# Altium PCB PCB1.PcbDoc
Units mil, origin at the board's own origin, x right, y up, seen from the top; angles counter-clockwise.
Board outline 1900 x 2150 mil, 2 copper layers (Top Layer, Bottom Layer); 9 components, 14 nets, 81 pads, 0 vias.
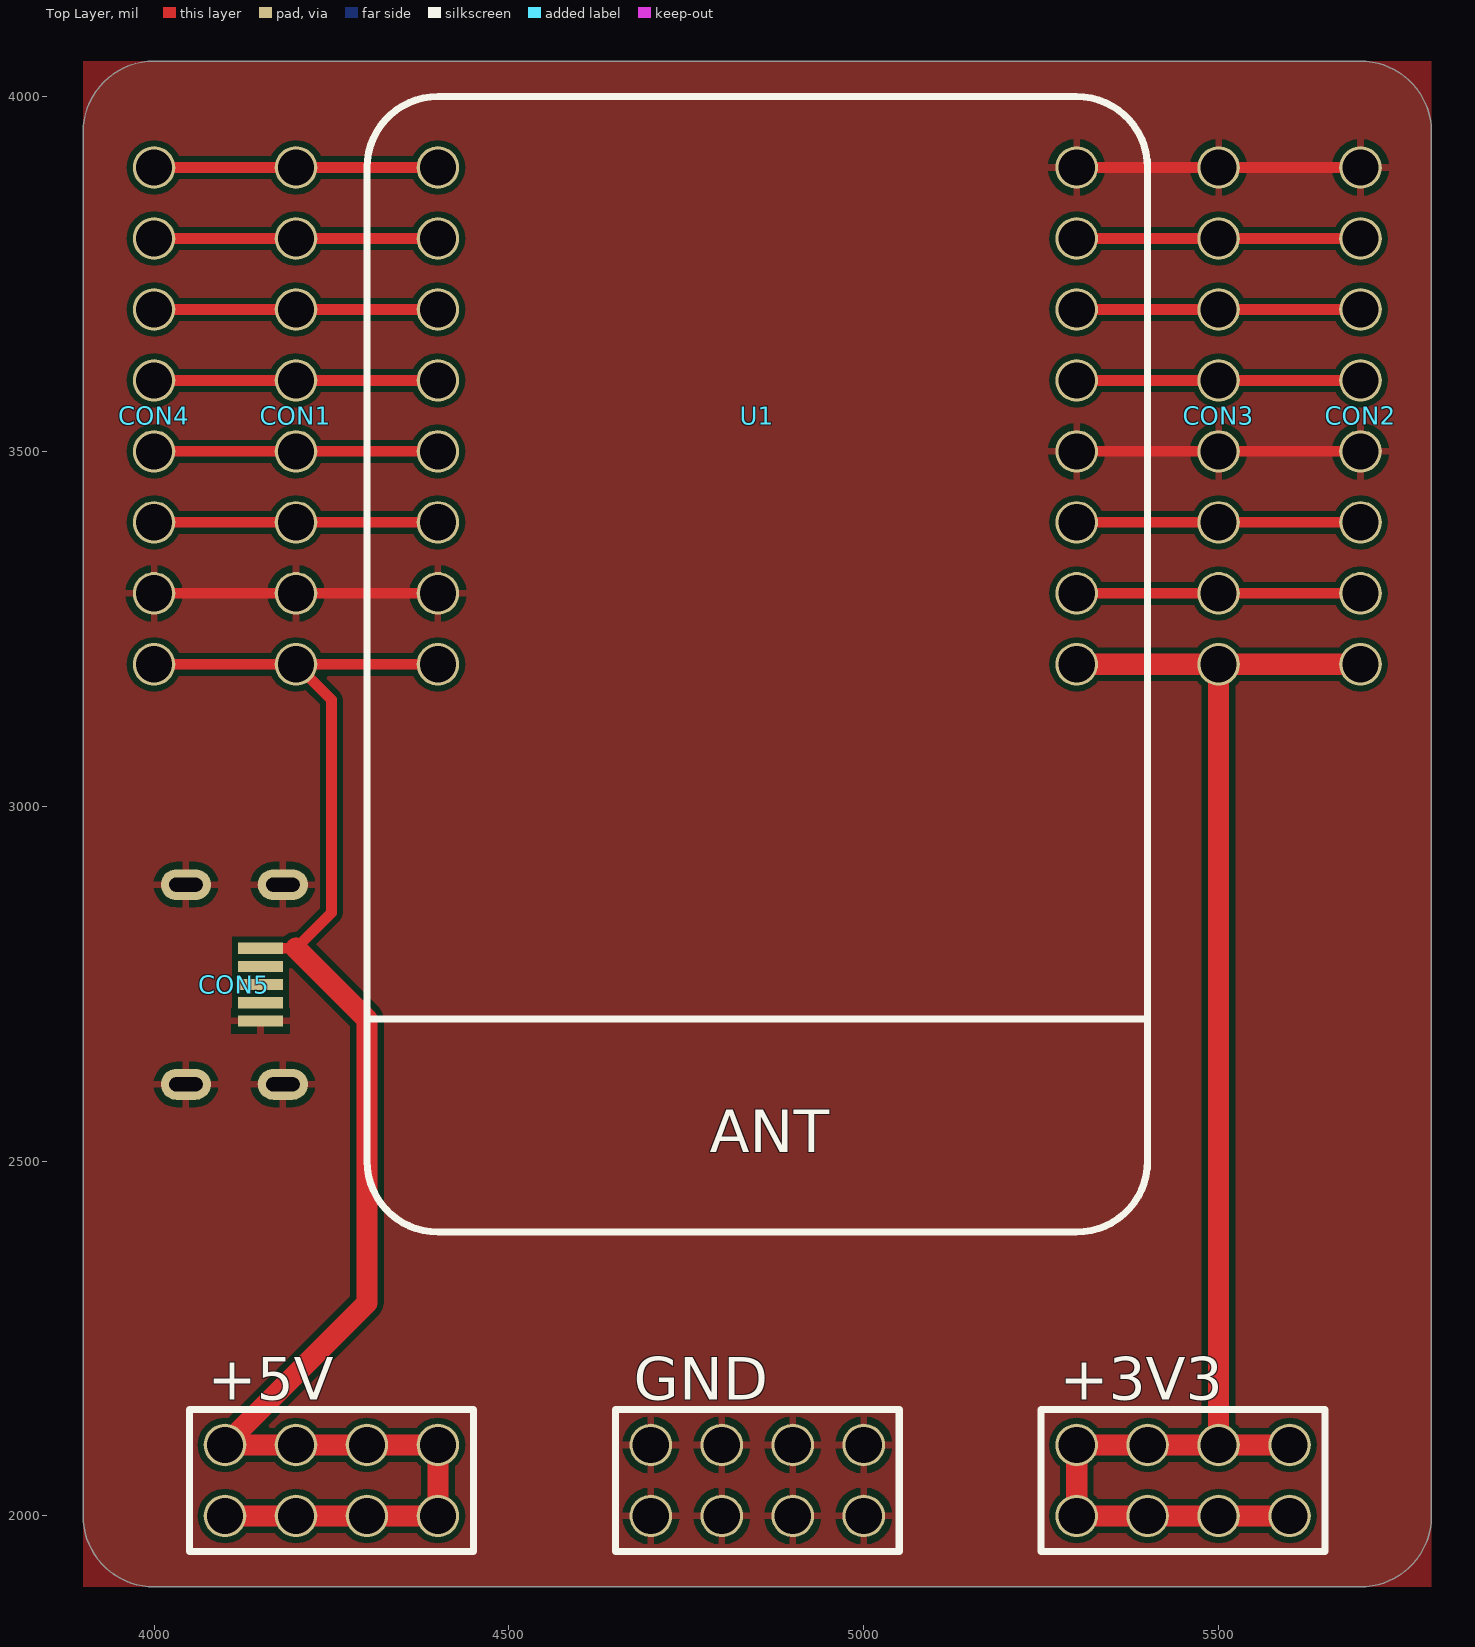
[diagram p0: Top Layer view]
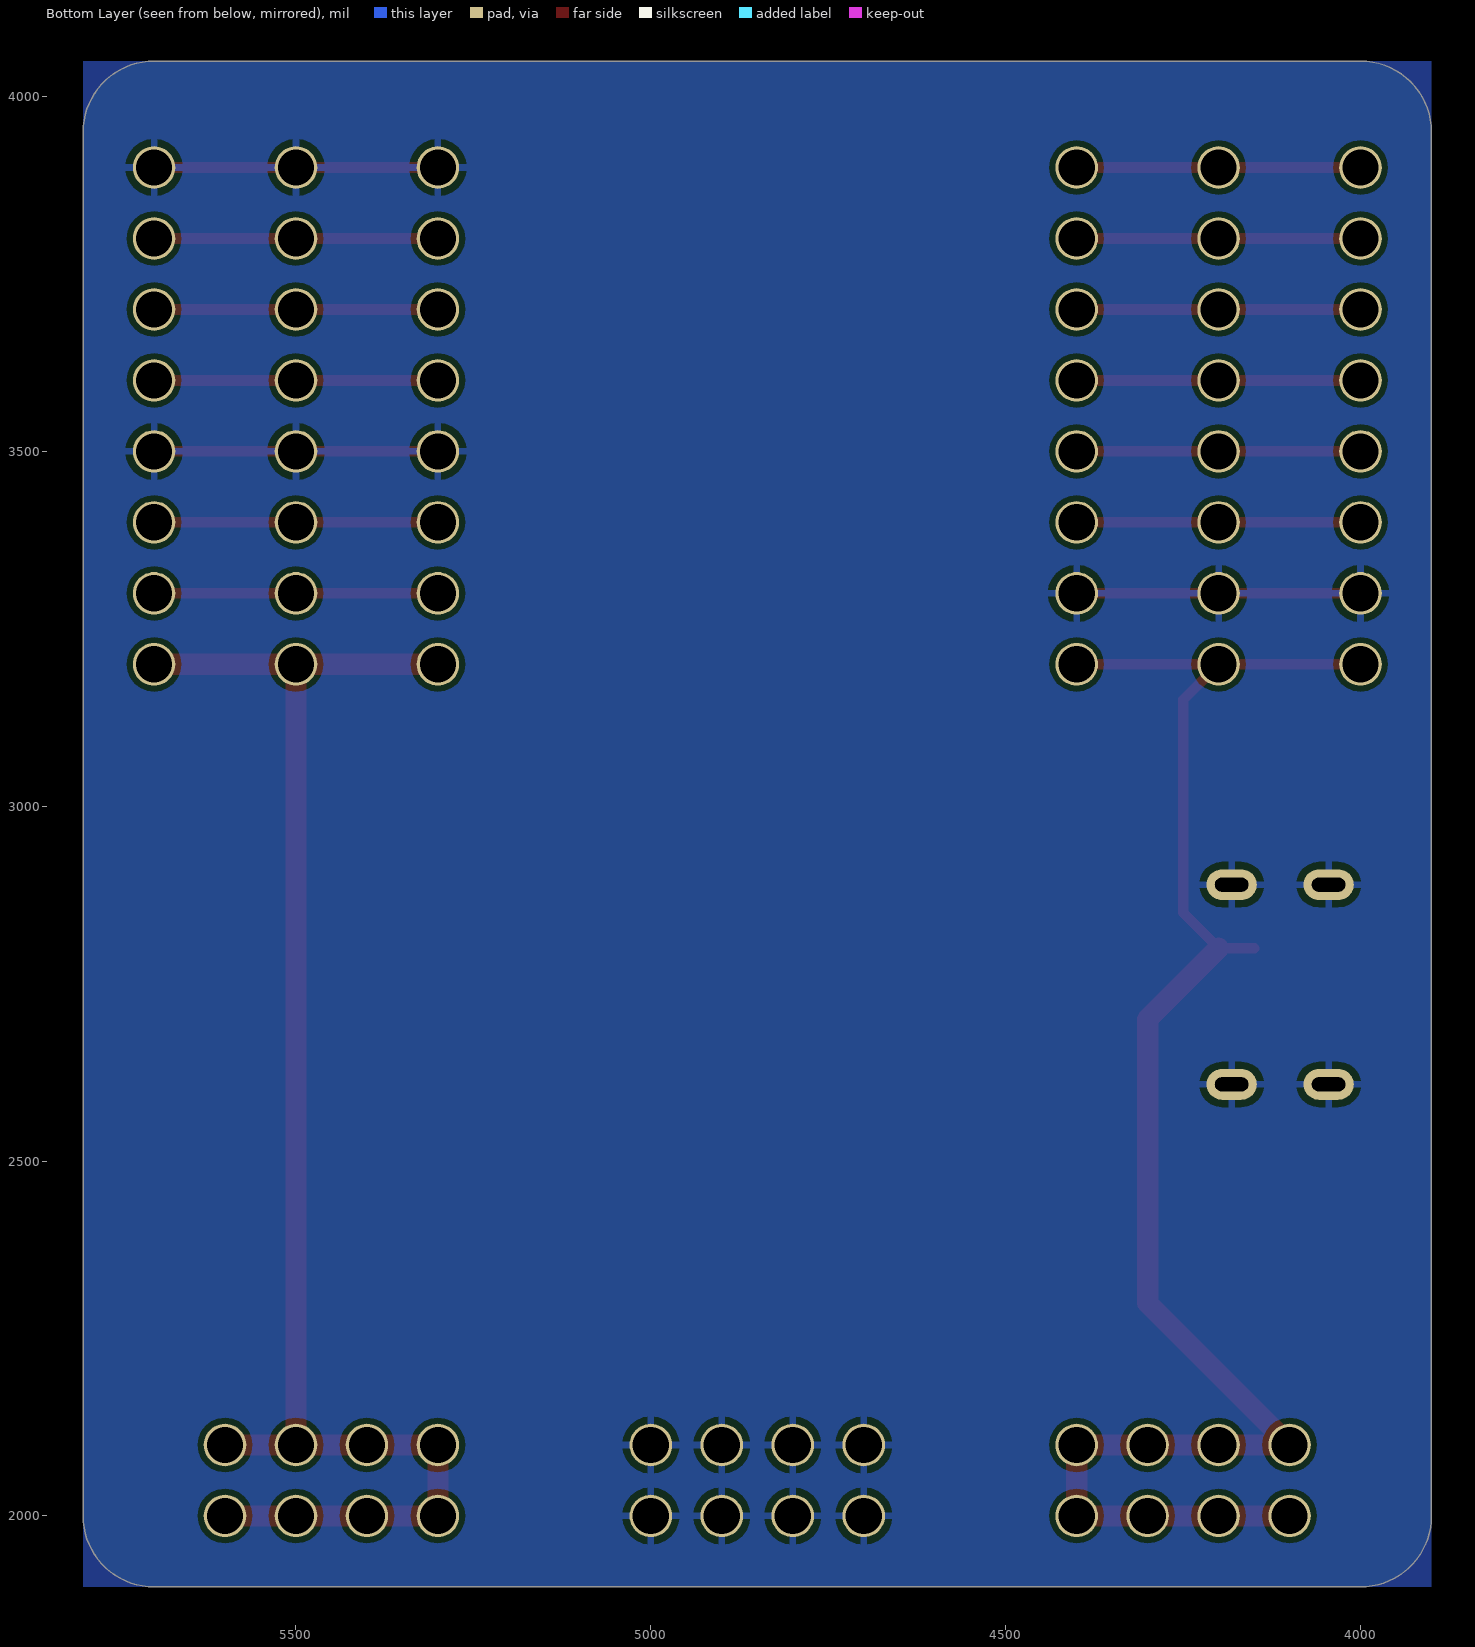
[diagram p1: Bottom Layer view, seen from below]

## Layer stack, top to bottom
Top Solder: solder mask 0.4, Solder Resist, Dk 3.5
Top Layer: signal copper 1.4
Dielectric 1: dielectric 12.6, FR-4, Dk 4.8
Bottom Layer: signal copper 1.4
Bottom Solder: solder mask 0.4, Solder Resist, Dk 3.5

## Board outline
3900,2000 ccw(c4000,2000) 4000,1900 5700,1900 ccw(c5700,2000) 5800,2000 5800,3950 ccw(c5700,3950) 5700,4050 4000,4050 ccw(c4000,3950) 3900,3950

## Design rules (kind name [scope] priority, off if disabled: settings)
Clearance Clearance_1 [All] p1: gap=8 ignorepadtopadclearanceinfootprint=FALSE
Clearance [All] p2: gap=4 ignorepadtopadclearanceinfootprint=FALSE
PolygonConnect [All] p1: thpad.connectstyle=Relief thpad.reliefconductorwidth=10 thpad.reliefentries=4 thpad.polygonreliefangle="90 Angle" thpad.airgapwidth=10 smdpad.connectstyle=Relief smdpad.reliefconductorwidth=10 smdpad.reliefentries=4 smdpad.polygonreliefangle="90 Angle" smdpad.airgapwidth=10 via.connectstyle=Direct via.reliefconductorwidth=10 via.reliefentries=4 via.polygonreliefangle="90 Angle" via.airgapwidth=10
RoutingVias [All] p1: holewidth=16 width=25 viastyle="Through Hole" minholewidth=16 minwidth=25 maxholewidth=16 maxwidth=25
SolderMaskExpansion [All] p1: expansion=4 istentingtop=FALSE
Width [All] p1: maxlimit=30 minlimit=10 preferedwidth=15
30 further rules are at their usual default settings.

## Classes and differential pairs
component class Sheet1: +3V3 +5V CON1 CON2 CON3 CON4 CON5 GND

## Components (designator, comment, footprint, x,y, rotation, side; value= is the part's Value field where it differs from the comment)
+3V3 "8PIN_Connector" 8PIN_2 5599.17,2103.51 r180 top (schematic designator CON7)
+5V "8PIN_Connector" 8PIN_2 4399.17,2103.51 r180 top (schematic designator CON6)
CON1 "8PIN_Connector" 8PIN 4200,3400 r90 top
CON2 "8PIN_Connector" 8PIN 5700,3700 r270 top
CON3 "8PIN_Connector" 8PIN 5500,3700 r270 top
CON4 "8PIN_Connector" 8PIN 4000,3400 r90 top
CON5 "USB_Connector" MicroUSB 4181.5,2748.82 r0 top
GND "8PIN_Connector" 8PIN_2 4999.17,2103.51 r180 top (schematic designator CON8)
U1 "ESP32_CAM" ESPCAM_BOARD 4400,3900 r0 top

## Footprints (in the part's own frame and the unit in brackets; to place one, negate y for a bottom-side part, rotate by r counter-clockwise, add the part's x,y. Pads: shape width x height; smd on the part's side, far side on the other; paste and mask are expansions set on the pad)
8PIN [mil]
  round 60 hole 51.18: 1(-200,0) 2(-100,0) 3(0,0) 4(100,0) 5(200,0) 6(300,0) 7(400,0) 8(500,0)
8PIN_2 [mil]
  round 60 hole 51.18: 1(-0.83,103.51) 2(-0.83,3.51) 3(99.17,103.51) 4(99.17,3.51) 5(199.17,103.51) 6(199.17,3.51) 7(299.17,103.51) 8(299.17,3.51)
ESPCAM_BOARD [mil]
  round 60 hole 51.18: 1(0,0) 2(0,-100) 3(0,-200) 4(0,-300) 5(0,-400) 6(0,-500) 7(0,-600) 8(0,-700) 9(900,-700) 10(900,-600) 11(900,-500) 12(900,-400) 13(900,-300) 14(900,-200) 15(900,-100) 16(900,0)
  silkscreen extent -100,-1500 1000,100
MicroUSB [mm]
  rect 1.6x0.4 smd mask+0.05: 1(-0.8,1.3) 2(-0.8,0.65) 3(-0.8,0) 4(-0.8,-0.65) 5(-0.8,-1.3)
  oval 1.8x1.1 hole 0.5 slot 1.2 at 0 deg: GND(-3.47,-3.575) GND(-3.47,3.575) GND(0,-3.575) GND(0,3.575)

## Nets (pads, with @x,y where several pads share a name; then routed paths per layer and width w, separated by ;. In a path a pad name is that pad's centre, name@x,y a point inside that pad or via, vN(x,y) a via of type N, cw(c..) or ccw(c..) an arc to the next point about the centre after c; other vN are vias at no path point)
+5: +5V.1 +5V.2 +5V.3 +5V.4 +5V.5 +5V.6 +5V.7 +5V.8 CON1.1 CON4.1 CON5.1 U1.8 | length 2415.7
  Top Layer w15: CON4.1 CON1.1 ; CON5.1 4200,2800 4250,2850 4250,3150 CON1.1 ; U1.8 CON1.1
  Top Layer w30: +5V.7 +5V.3 +5V.1 +5V.2 +5V.8 4300,2300 4300,2700 4200,2800
GND: CON1.2 CON2.1 CON2.5 CON3.1 CON3.5 CON4.2 CON5.5 CON5.GND GND.1 GND.2 GND.3 GND.4 GND.5 GND.6 GND.7 GND.8 U1.7 U1.12 U1.16 | length 1200
  Top Layer w15: CON4.2 CON1.2 U1.7 ; U1.12 CON2.5 ; U1.16 CON3.1 CON2.1
NetCON1_3: CON1.3 CON4.3 U1.6 | length 400
  Top Layer w15: CON4.3 CON1.3 U1.6
NetCON1_4: CON1.4 CON4.4 U1.5 | length 400
  Top Layer w15: CON4.4 CON1.4 U1.5
NetCON1_5: CON1.5 CON4.5 U1.4 | length 400
  Top Layer w15: CON4.5 CON1.5 U1.4
NetCON1_6: CON1.6 CON4.6 U1.3 | length 400
  Top Layer w15: CON4.6 CON1.6 U1.3
NetCON1_7: CON1.7 CON4.7 U1.2 | length 400
  Top Layer w15: CON4.7 CON1.7 U1.2
NetCON1_8: CON1.8 CON4.8 U1.1 | length 400
  Top Layer w15: CON4.8 CON1.8 U1.1
NetCON2_2: CON2.2 CON3.2 U1.15 | length 400
  Top Layer w15: U1.15 CON2.2
NetCON2_3: CON2.3 CON3.3 U1.14 | length 400
  Top Layer w15: U1.14 CON3.3 CON2.3
NetCON2_4: CON2.4 CON3.4 U1.13 | length 400
  Top Layer w15: U1.13 CON3.4 CON2.4
NetCON2_6: CON2.6 CON3.6 U1.11 | length 400
  Top Layer w15: U1.11 CON2.6
NetCON2_7: CON2.7 CON3.7 U1.10 | length 400
  Top Layer w15: U1.10 CON3.7 CON2.7
VCC: +3V3.1 +3V3.2 +3V3.3 +3V3.4 +3V3.5 +3V3.6 +3V3.7 +3V3.8 CON2.8 CON3.8 U1.9 | length 2200
  Top Layer w30: U1.9 CON3.8 ; +3V3.1 +3V3.3 +3V3.7 +3V3.8 +3V3.6 +3V3.4 ; +3V3.2 +3V3.4 ; CON2.8 CON3.8 ; +3V3.4 CON3.8
pads on no net: CON5.2 CON5.3 CON5.4

## Polygon pours and split planes (outlines as drawn)
GND on Top Layer "GND_L01_P000" (solid, remove dead copper, pour order 0): 3900,4050 5800,4050 5800,1900 3900,1900
GND on Bottom Layer "GND_L02_P001" (solid, remove dead copper, pour order 1): 3900,4050 5800,4050 5800,1900 3900,1900

## Silkscreen, mask and mechanical layers (free items; w line width, h text height)
Top Overlay:
  lines w10: 4050,1950 4050,2150 4450,2150 4450,1950 4050,1950 ; 4650,1950 4650,2150 5050,2150 5050,1950 4650,1950 ; 5250,1950 5250,2150 5650,2150 5650,1950 5250,1950
Mechanical 1:
  the board outline again, w10

## Text inside footprints (layer, text, board x,y; h text height)
U1: Top Overlay "ANT" at 4782.87,2512.2 h60